# EAGLE board Board_Eagle (EAGLE 9.6.2)
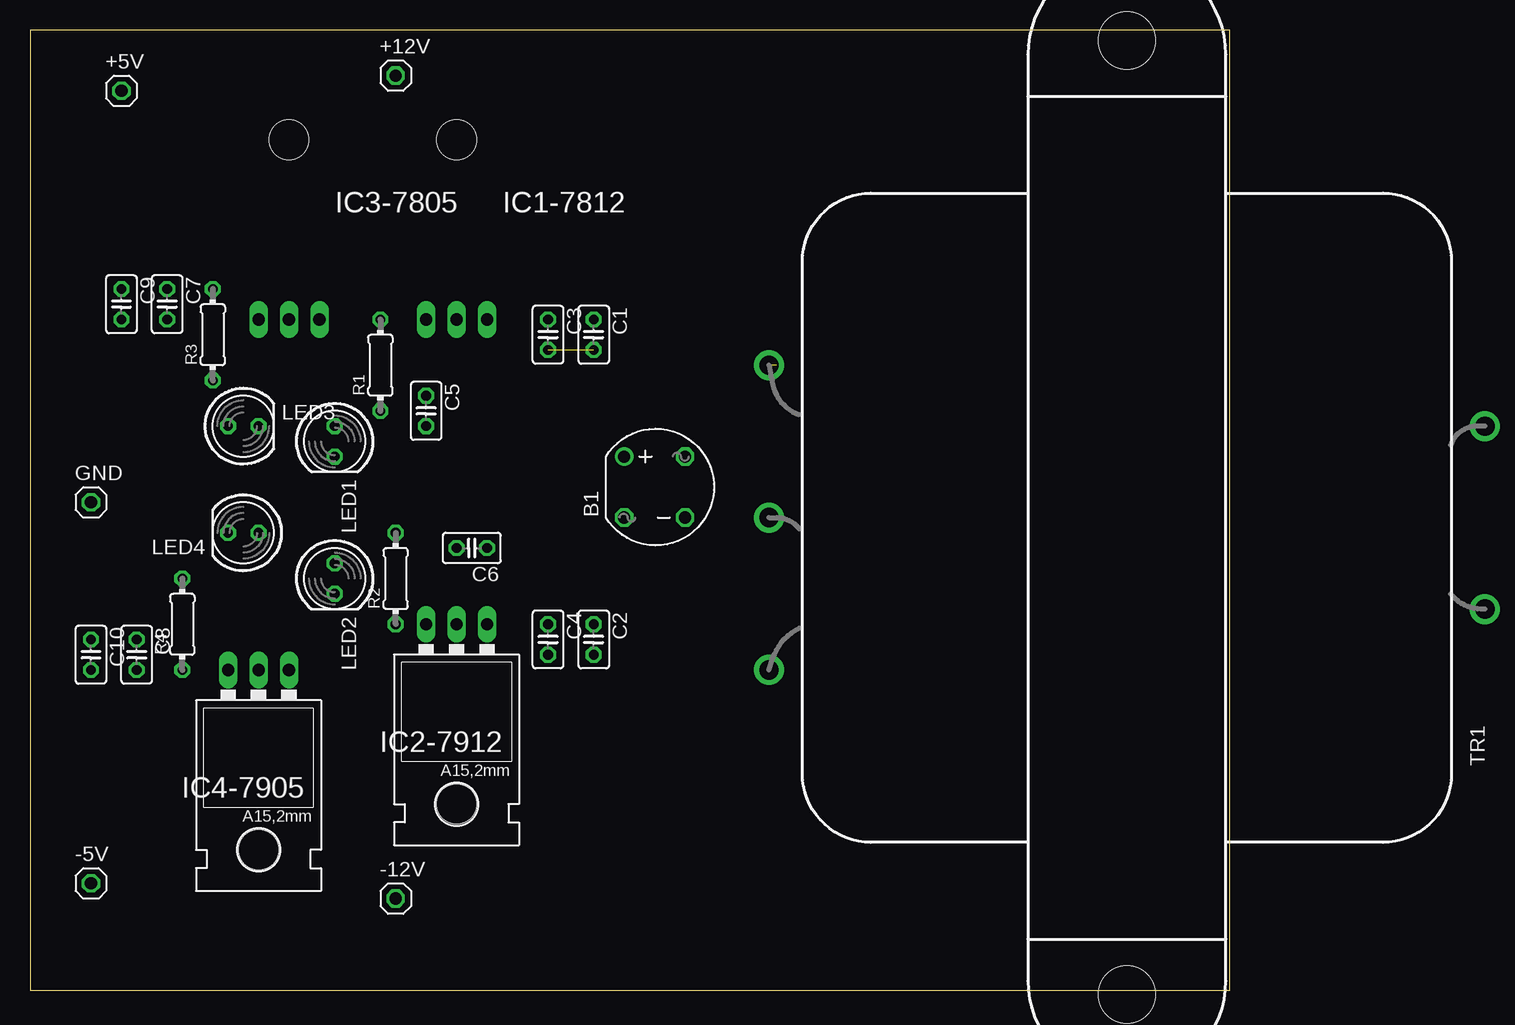
[diagram p0: board, top side]
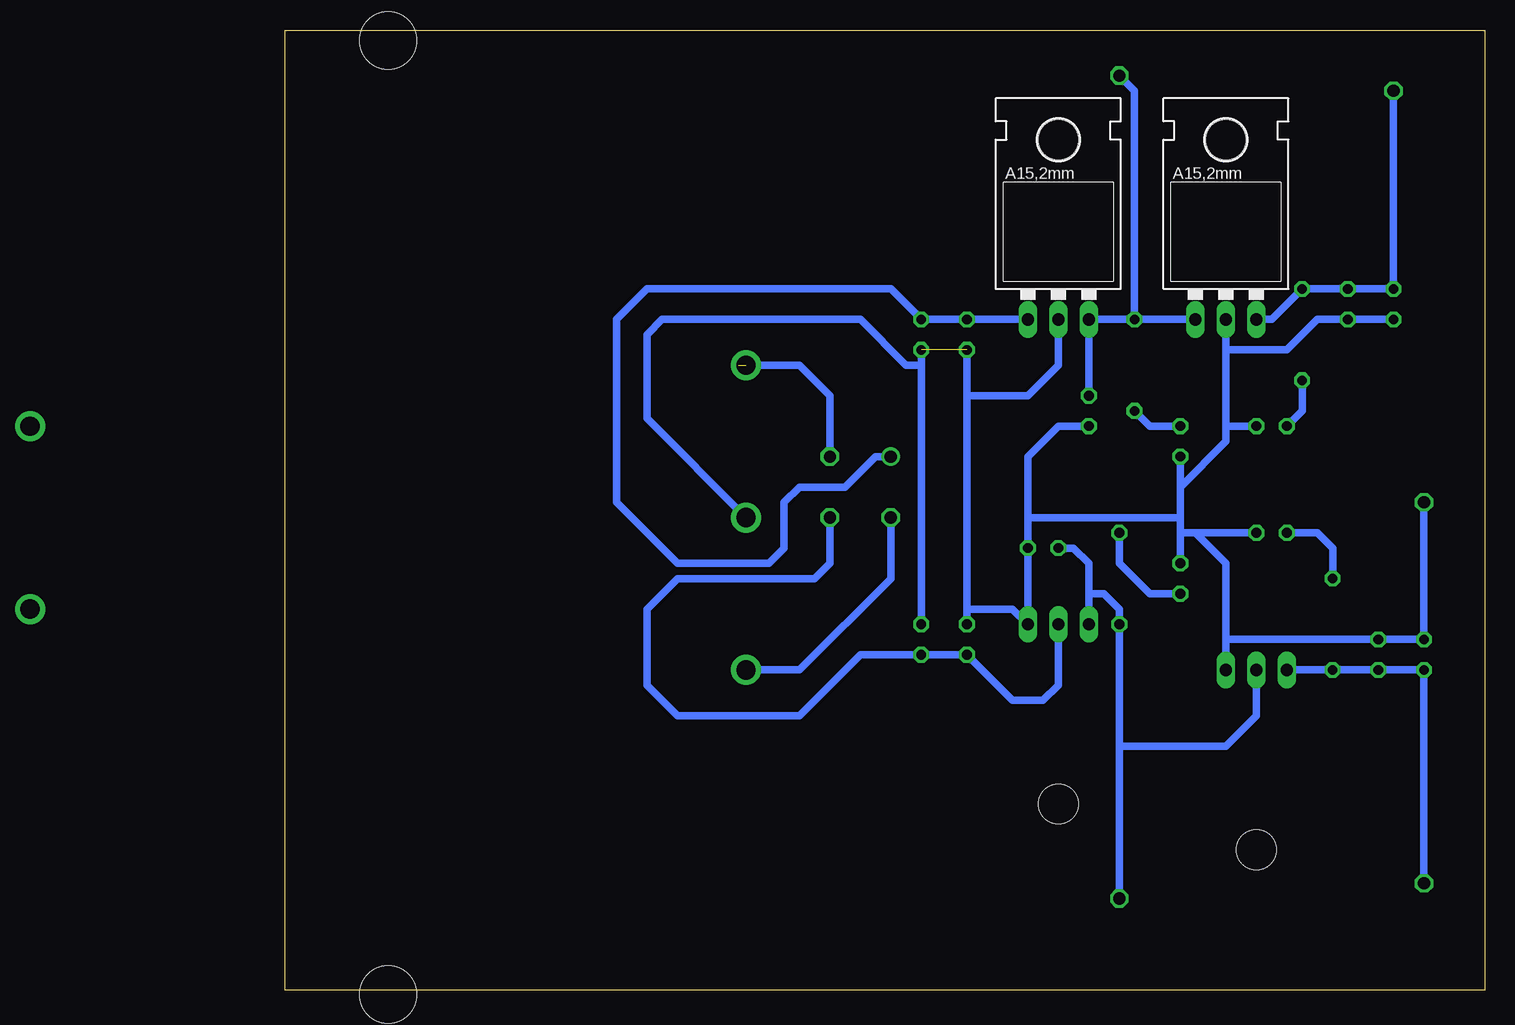
[diagram p1: board, bottom side, seen from below]

Size 100 x 80 mm. Coordinates in mm from the lower left corner, seen from the top.
Outline: 0,0 100,0 100,80 0,80 0,0
Copper layers (1*16): Top 0.035mm / dielectric 1.5mm / Bottom 0.035mm
Design rules "default": minimum track width 6mil, minimum drill 0.35mm, track to track 6mil, track to pad 6mil, pad to pad 6mil, via to via 6mil, smd to smd 6mil, copper to edge 40mil, drill to drill 6mil, minimum pad ring 10mil, minimum via ring 8mil, stop-mask expansion 4mil, vias tented up to drill 0mil, thermal gap 10mil

## Footprints (pad centres in the part's own frame; a part is rotated, then mirrored left to right if it is on the bottom)
1X01 = drill 1.016 octagon: 1 0,0
RB1A = drill 1.016: + -2.54,2.54 | drill 1.016 octagon: - 2.54,-2.54; AC1 2.54,2.54; AC2 -2.54,-2.54
C025-025X050 = drill 0.813 octagon: 1 -1.27,0; 2 1.27,0
78XXL = drill 1.016 long: GND 0,-3.81; IN -2.54,-3.81; OUT 2.54,-3.81 | hole 3.302: 0,11.176
79XXL = drill 1.016 long: GND -2.54,-3.81; IN 0,-3.81; OUT 2.54,-3.81 | hole 3.302: 0,11.176
LED5MM = drill 0.813 octagon: A -1.27,0; K 1.27,0
0204/7 = drill 0.813 octagon: 1 -3.81,0; 2 3.81,0
C13H = drill 1.6 pad 2.5: BLK@1 -7.62,-29.846; BLK@2 7.62,-29.846; GRN/YEL 0,29.846; GRN@1 -12.7,29.846; GRN@2 12.7,29.846 | hole 4.75: 39.751,0; -39.751,0

## Placement (x,y rotation side)
+5V  [1X01]  7.62,74.93 0 top
+12V  [1X01]  30.48,76.2 0 top
-5V  [1X01]  5.08,8.89 0 top
-12V  [1X01]  30.48,7.62 0 top
B1  [RB1A]  52.07,41.91 0 top
C1  [C025-025X050]  46.99,54.61 270 top
C2  [C025-025X050]  46.99,29.21 270 top
C3  [C025-025X050]  43.18,54.61 270 top
C4  [C025-025X050]  43.18,29.21 270 top
C5  [C025-025X050]  33.02,48.26 270 top
C6  [C025-025X050]  36.83,36.83 180 top
C7  [C025-025X050]  11.43,57.15 270 top
C8  [C025-025X050]  8.89,27.94 270 top
C9  [C025-025X050]  7.62,57.15 270 top
C10  [C025-025X050]  5.08,27.94 270 top
GND  [1X01]  5.08,40.64 0 top
IC1-7812  [78XXL]  35.56,59.69 0 bottom
IC2-7912  [79XXL]  35.56,26.67 180 top
IC3-7805  [78XXL]  21.59,59.69 0 bottom
IC4-7905  [79XXL]  19.05,22.86 180 top
LED1  [LED5MM]  25.4,45.72 270 top
LED2  [LED5MM]  25.4,34.29 270 top
LED3  [LED5MM]  17.78,46.99 0 top
LED4  [LED5MM]  17.78,38.1 180 top
R1  [0204/7]  29.21,52.07 90 top
R2  [0204/7]  30.48,34.29 90 top
R3  [0204/7]  15.24,54.61 90 top
R4  [0204/7]  12.7,30.48 90 top
TR1  166N12  [C13H]  91.44,39.37 90 top

## Library data of the parts
+5V +12V -5V -12V GND = pinhead
B1 = rectifier
C1-C10 = rcl; SPICEPREFIX: C
IC1-7812 IC2-7912 IC3-7805 IC4-7905 = v-reg
LED1-LED4 = led
R1-R4 = rcl; SPICEPREFIX: R
TR1 = trafo-hammondmfg

## Nets
+5V: +5V.1 C7.1 C9.1 IC3-7805.OUT R3.2
+12V: +12V.1 C5.1 IC1-7812.OUT IC3-7805.IN R1.2
-5V: -5V.1 C8.2 C10.2 IC4-7905.OUT R4.1
-12V: -12V.1 C6.2 IC2-7912.OUT IC4-7905.IN R2.1
GND: C1.2 C2.1 C3.2 C4.1 C5.2 C6.1 C7.2 C8.1 C9.2 C10.1 GND.1 IC1-7812.GND IC2-7912.GND IC3-7805.GND IC4-7905.GND LED1.K LED2.A LED3.K LED4.A TR1.GRN/YEL
N$1: B1.AC1 TR1.GRN@2
N$2: B1.AC2 TR1.GRN@1
N$3: B1.+ C1.1 C3.1 IC1-7812.IN
N$4: B1.- C2.2 C4.2 IC2-7912.IN
N$10: LED1.A R1.1
N$11: LED2.K R2.2
N$13: LED3.A R3.1
N$18: LED4.K R4.2

## Tracks (layer width: path | path; a pad name or v marks a point on that pad's centre or on a via)
+5V
  Bottom 0.61: IC3-7805.OUT 17.78,55.88 R3.2 C7.1 C9.1 +5V.1
+12V
  Bottom 0.61: C5.1 IC1-7812.OUT R1.2 | R1.2 29.21,74.93 +12V.1 | IC3-7805.IN R1.2
-5V
  Bottom 0.61: IC4-7905.OUT R4.1 C8.2 C10.2 -5V.1
-12V
  Bottom 0.61: IC2-7912.OUT 33.02,33.02 | 33.02,33.02 33.02,35.56 34.29,36.83 C6.2 | 33.02,33.02 31.75,33.02 30.48,31.75 R2.1 30.48,20.32 | -12V.1 30.48,20.32 | IC4-7905.IN 19.05,22.86 21.59,20.32 30.48,20.32
GND  (1 unrouted)
  Bottom 0.61: C1.2 46.99,52.07 | 46.99,52.07 C2.1 | TR1.GRN/YEL 69.85,47.63 69.85,54.61 68.58,55.88 52.07,55.88 48.26,52.07 46.99,52.07 | C4.1 43.18,31.75 | 43.18,31.75 43.18,49.53 | 43.18,49.53 C3.2 | IC1-7812.GND 35.56,52.07 38.1,49.53 43.18,49.53 | 43.18,31.75 39.37,31.75 IC2-7912.GND C6.1 38.1,39.37 | C5.2 35.56,46.99 38.1,44.45 38.1,39.37 | LED1.K 25.4,41.91 | 25.4,41.91 25.4,39.37 | 25.4,39.37 25.4,38.1 | 25.4,38.1 LED2.A | 25.4,39.37 38.1,39.37 | 25.4,41.91 21.59,45.72 21.59,46.99 | IC3-7805.GND 21.59,53.34 | 21.59,53.34 21.59,46.99 | 24.13,38.1 25.4,38.1 | IC4-7905.GND 21.59,29.21 | 21.59,29.21 21.59,35.56 24.13,38.1 | 21.59,29.21 C8.1 C10.1 GND.1 | C9.2 C7.2 13.97,55.88 16.51,53.34 21.59,53.34 | LED3.K 21.59,46.99 | LED4.A 24.13,38.1
N$1  (1 unrouted)
  Bottom 0.61: B1.AC1 54.61,49.53 57.15,52.07 62.23,52.07
N$2
  Bottom 0.61: TR1.GRN@1 57.15,26.67 49.53,34.29 B1.AC2
N$3
  Bottom 0.61: B1.+ 50.8,44.45 53.34,41.91 57.15,41.91 58.42,40.64 58.42,36.83 59.69,35.56 67.31,35.56 72.39,40.64 72.39,55.88 69.85,58.42 49.53,58.42 C1.1 C3.1 IC1-7812.IN
N$4
  Bottom 0.61: B1.- 54.61,35.56 55.88,34.29 67.31,34.29 69.85,31.75 69.85,25.4 67.31,22.86 57.15,22.86 52.07,27.94 C2.2 C4.2 39.37,24.13 36.83,24.13 35.56,25.4 IC2-7912.IN
N$10
  Bottom 0.61: R1.1 27.94,46.99 LED1.A
N$11
  Bottom 0.61: R2.2 30.48,35.56 27.94,33.02 LED2.K
N$13
  Bottom 0.61: LED3.A 15.24,48.26 R3.1
N$18
  Bottom 0.61: R4.2 12.7,36.83 13.97,38.1 LED4.K